# EAGLE board Arduino shift register (EAGLE 9.7.0)

Size 174.74 x 114.6 mm. Coordinates in mm from the lower left corner, seen from the top.
Outline: 0,0 174.74,0 174.74,114.6 0,114.6 0,0
Copper layers (1*16): Top 0.035mm / dielectric 1.5mm / Bottom 0.035mm
Design rules "default": minimum track width 6mil, minimum drill 0.35mm, track to track 6mil, track to pad 6mil, pad to pad 6mil, via to via 6mil, smd to smd 6mil, copper to edge 40mil, drill to drill 6mil, minimum pad ring 10mil, minimum via ring 8mil, stop-mask expansion 4mil, vias tented up to drill 0mil, thermal gap 10mil

## Footprints (pad centres in the part's own frame; a part is rotated, then mirrored left to right if it is on the bottom)
LEDRD254W60D565H860B = drill 0.981 pad 1.581: 1 -1.27,0; 2 1.27,0
RESAD1016W63L850D250B = drill 0.83 pad 1.43: 1 -5.08,0; 2 5.08,0
DIP762W53P254L1969H508Q16B = drill 0.743 pad 1.343: 1 -3.81,8.89; 2 -3.81,6.35; 3 -3.81,3.81; 4 -3.81,1.27; 5 -3.81,-1.27; 6 -3.81,-3.81; 7 -3.81,-6.35; 8 -3.81,-8.89; 9 3.81,-8.89; 10 3.81,-6.35; 11 3.81,-3.81; 12 3.81,-1.27; 13 3.81,1.27; 14 3.81,3.81; 15 3.81,6.35; 16 3.81,8.89
ARDUINO-UNO-R3-SHIELD = drill 1.016 pad 1.88: 3.3V 24.13,-2.54; 5V 24.13,0; A0 24.13,12.7; A1 24.13,15.24; A2 24.13,17.78; A3 24.13,20.32; A4 24.13,22.86; A5 24.13,25.4; AREF -24.13,-13.97; D2 -24.13,20.32; D3 -24.13,17.78; D4 -24.13,15.24; D5 -24.13,12.7; D6 -24.13,10.16; D7 -24.13,7.62; D8 -24.13,3.81; D9 -24.13,1.27; D10 -24.13,-1.27; D11 -24.13,-3.81; D12 -24.13,-6.35; D13 -24.13,-8.89; GND@0 24.13,2.54; GND@1 24.13,5.08; GND@2 -24.13,-11.43; IOREF 24.13,-7.62; NC 24.13,-10.16; RES 24.13,-5.08; RX -24.13,25.4; SCL -24.13,-19.05; SDA -24.13,-16.51; TX -24.13,22.86; VIN 24.13,7.62

## Placement (x,y rotation side)
D1  RED  [LEDRD254W60D565H860B]  51.84,7.91 0 top
D3  RED  [LEDRD254W60D565H860B]  67.08,7.91 0 top
D4  RED  [LEDRD254W60D565H860B]  84.86,7.91 0 top
D5  RED  [LEDRD254W60D565H860B]  102.64,7.91 0 top
D6  RED  [LEDRD254W60D565H860B]  120.42,7.91 0 top
D7  RED  [LEDRD254W60D565H860B]  138.2,7.91 0 top
D8  RED  [LEDRD254W60D565H860B]  153.44,7.91 0 top
D9  RED  [LEDRD254W60D565H860B]  168.68,7.91 0 top
R2  1k  [RESAD1016W63L850D250B]  45.49,18.07 0 top
R3  1k  [RESAD1016W63L850D250B]  60.73,18.07 0 top
R4  1k  [RESAD1016W63L850D250B]  78.51,18.07 0 top
R6  1k  [RESAD1016W63L850D250B]  96.29,18.07 0 top
R7  1k  [RESAD1016W63L850D250B]  114.07,18.07 0 top
R8  1k  [RESAD1016W63L850D250B]  131.85,18.07 0 top
R9  1k  [RESAD1016W63L850D250B]  147.09,18.07 0 top
R10  1k  [RESAD1016W63L850D250B]  162.33,18.07 0 top
U2  74HC595_PDIP  [DIP762W53P254L1969H508Q16B]  18.82,21.88 90 top
U5  ARDUINO-UNO-R3-SHIELD  [ARDUINO-UNO-R3-SHIELD]  47.88,84.75 270 top

## Library data of the parts
D1 D3-D9 = Tinkercad; CATEGORY: Opto-Electronic; SUB-CATEGORY: LED; VALUE: LED_RED
R2-R4 R6-R10 U2 U5 = Tinkercad

## Nets
D1_A: D1.1 R2.2
D3_A: D3.1 R3.2
D4_A: D4.1 R4.2
D5_A: D5.1 R6.2
D6_A: D6.1 R7.2
D7_A: D7.1 R8.2
D8_A: D8.1 R9.2
D9_A: D9.1 R10.2
U2_Q0: R2.1 U2.15
U2_Q1: R3.1 U2.1
U2_Q2: R4.1 U2.2
U2_Q3: R6.1 U2.3
U2_Q4: R7.1 U2.4
U2_Q5: R8.1 U2.5
U2_Q6: R9.1 U2.6
U2_Q7: R10.1 U2.7
U5_3.3V: U2.10 U5.3.3V
U5_5V: U2.16 U5.5V
U5_D8: U2.12 U5.D8
U5_D11: U2.14 U5.D11
U5_D12: U2.11 U5.D12
U5_GND: D1.2 D3.2 D4.2 D5.2 D6.2 D7.2 D8.2 D9.2 U2.8 U2.13 U5.GND@0 U5.GND@1 U5.GND@2

## Tracks (layer width: path | path; a pad name or v marks a point on that pad's centre or on a via)
D1_A  (1 unrouted)
D3_A  (1 unrouted)
D4_A  (1 unrouted)
D5_A  (1 unrouted)
D6_A  (1 unrouted)
D7_A  (1 unrouted)
D8_A  (1 unrouted)
D9_A  (1 unrouted)
U2_Q0  (1 unrouted)
U2_Q1  (1 unrouted)
U2_Q2  (1 unrouted)
U2_Q3  (1 unrouted)
U2_Q4  (1 unrouted)
U2_Q5  (1 unrouted)
U2_Q6  (1 unrouted)
U2_Q7  (1 unrouted)
U5_3.3V  (1 unrouted)
U5_5V  (1 unrouted)
U5_D8  (1 unrouted)
U5_D11  (1 unrouted)
U5_D12  (1 unrouted)
U5_GND  (12 unrouted)